# Altium PCB CAN_Module.PcbDoc
Units mil, origin at the board's own origin, x right, y up, seen from the top; angles counter-clockwise.
Board outline 1500 x 1100 mil, 2 copper layers (Top Layer, Bottom Layer); 18 components, 20 nets, 74 pads, 5 vias.
Unrouted connection lines stored in the file: 7.
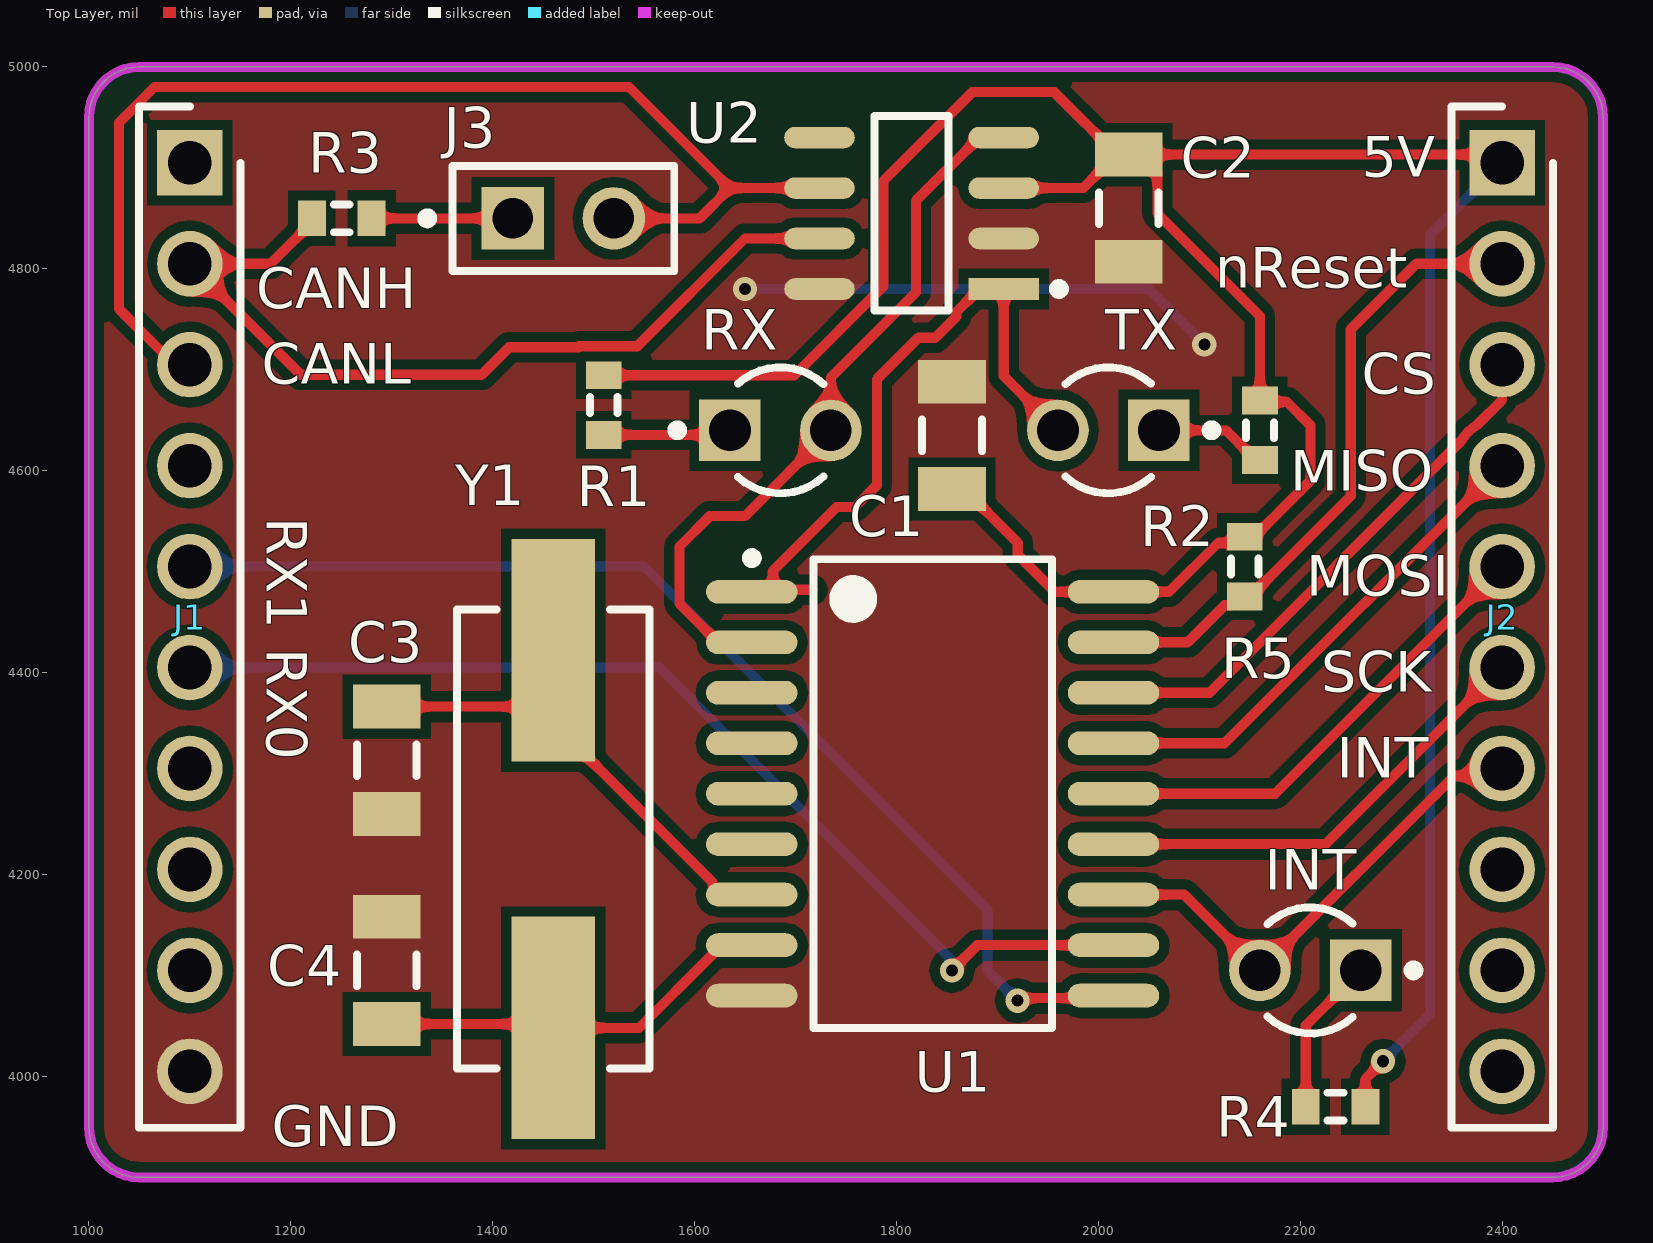
[diagram p0: Top Layer view]
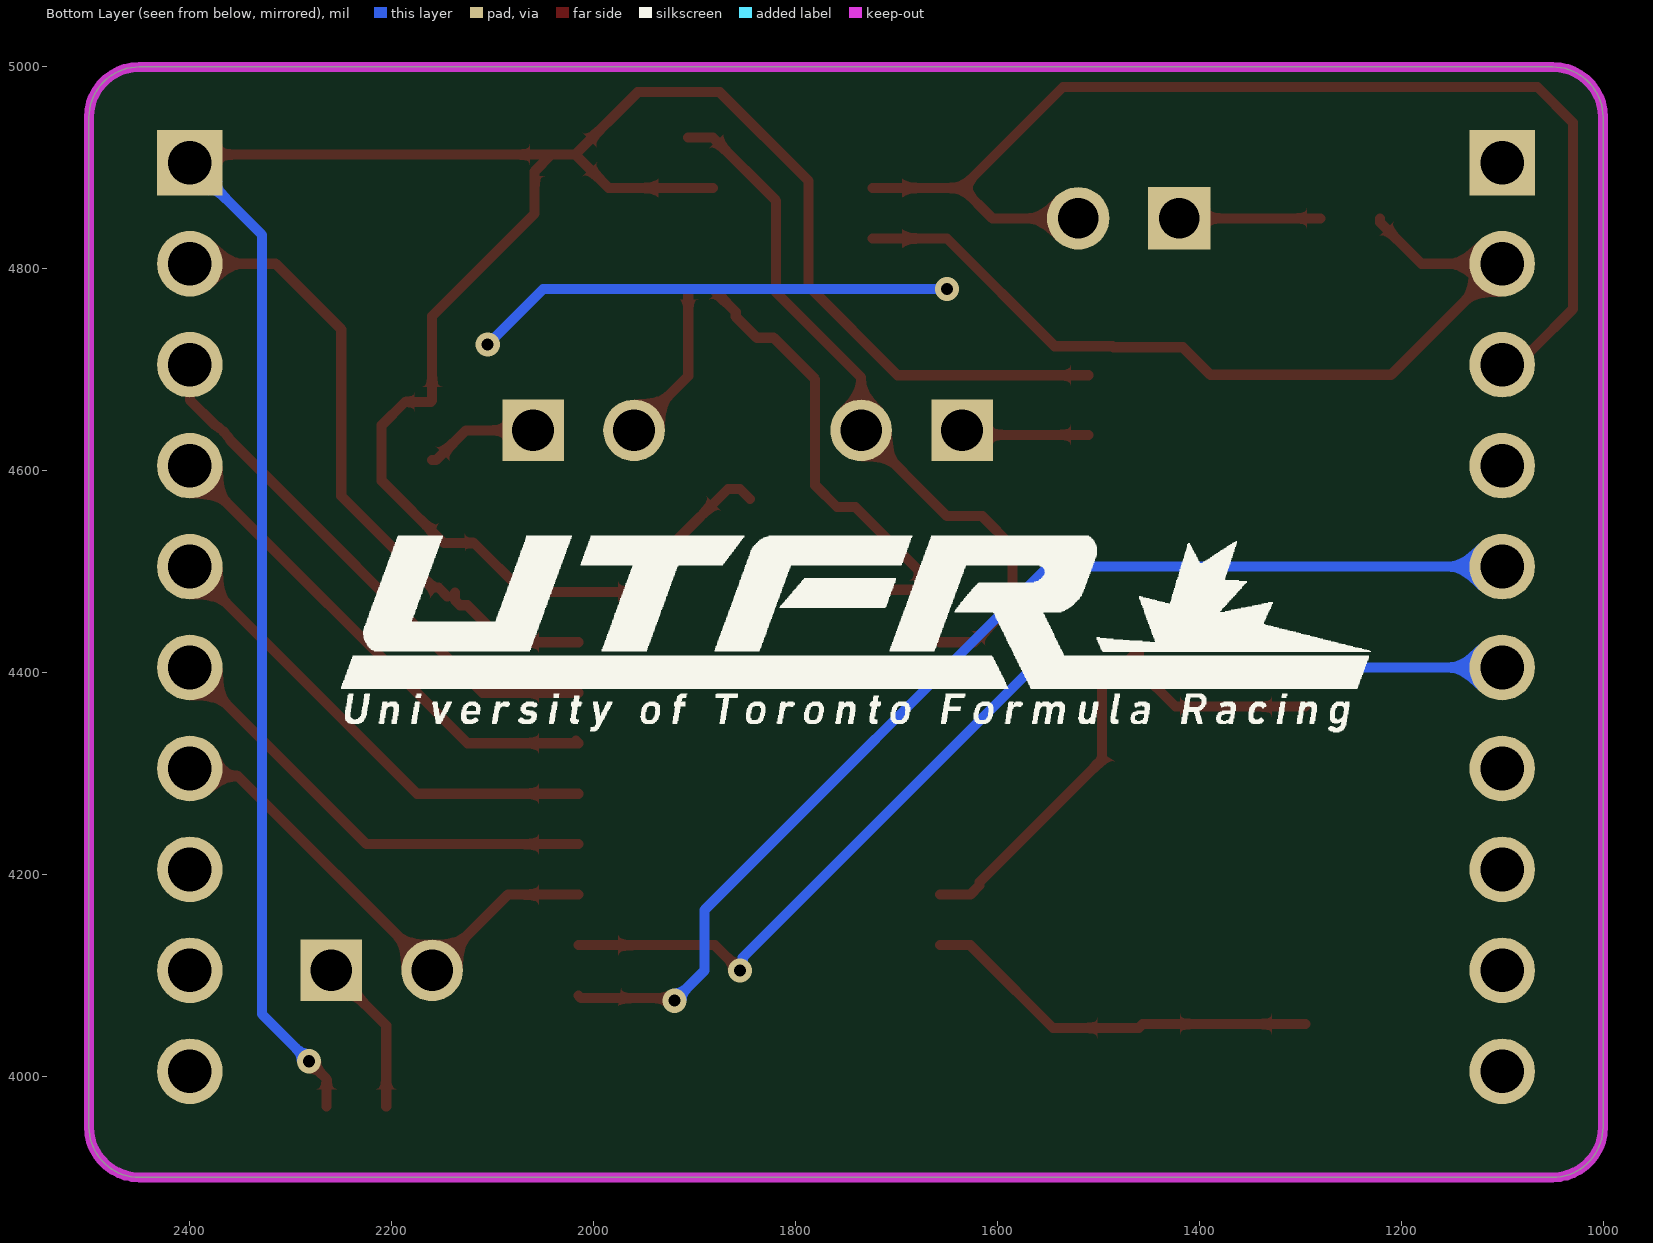
[diagram p1: Bottom Layer view, seen from below]

## Layer stack, top to bottom
Top Solder: solder mask 0.4, Solder Resist, Dk 3.5
Top Layer: signal copper 1.4
Dielectric 1: dielectric 12.6, FR-4, Dk 4.8
Bottom Layer: signal copper 1.4
Bottom Solder: solder mask 0.4, Solder Resist, Dk 3.5

## Board outline
1000,3950 1000,4950 cw(c1050,4950) 1050,5000 2450,5000 cw(c2450,4950) 2500,4950 2500,3950 cw(c2450,3950) 2450,3900 1050,3900 cw(c1050,3950)

## Design rules (kind name [scope] priority, off if disabled: settings)
Clearance [All] p1: gap=10 ignorepadtopadclearanceinfootprint=FALSE except(0: Arc-Hole Track-Hole SMDPad-Hole THPad-Hole Via-Hole Fill-Hole Poly-Hole Region-Hole Text-Hole)
ComponentClearance [All] p1: gap=0 collisioncheckmode=3 verticalgap=0 showdistances=FALSE
PolygonConnect PolygonConnect_3 [All vs IsNamedPolygon('GND_L01_P001')] p1: connectstyle=Direct reliefconductorwidth=10 reliefentries=4 polygonreliefangle="90 Angle" airgapwidth=10
PolygonConnect PolygonConnect_2 [All vs IsNamedPolygon('GND_L01_P001')] p2: connectstyle=Direct reliefconductorwidth=10 reliefentries=4 polygonreliefangle="90 Angle" airgapwidth=10
PolygonConnect PolygonConnect_1 [All vs IsNamedPolygon('NONET_L01_P000')] p3: connectstyle=Direct reliefconductorwidth=10 reliefentries=4 polygonreliefangle="90 Angle" airgapwidth=10
PolygonConnect [All] p4: connectstyle=Relief reliefconductorwidth=10 reliefentries=4 polygonreliefangle="90 Angle" airgapwidth=10
RoutingVias [All] p1: holewidth=28 width=50 viastyle="Through Hole" minholewidth=28 minwidth=50 maxholewidth=28 maxwidth=50
SolderMaskExpansion [All] p1: expansion=4 istentingtop=FALSE
Width [All] p1: maxlimit=10 minlimit=10 preferedwidth=10
29 further rules are at their usual default settings.

## Classes and differential pairs
component class CAN_Module: C1 C2 C3 C4 INT J1 J2 R1 R2 R3 R4 R5 RX TX U1 U2 Y1

## Components (designator, comment, footprint, x,y, rotation, side; value= is the part's Value field where it differs from the comment)
C1 "100nF" C1206 1855,4635 r90 top
C2 "100nF" C1206 2030,4860 r270 top
C3 "22pF" C1206 1295,4313.15 r90 top
C4 "22pF" C1206 1295,4105 r90 top
INT "HLMP-1719" AVAG-HLMP-1719_V 2210,4105 r180 top (schematic designator DS3)
J1 "68000-210HLF" HDRV10W63P0X254_1X10_2540X241X858P 1100,4905 r270 top
J2 "68000-210HLF" HDRV10W63P0X254_1X10_2540X241X858P 2400,4905 r270 top
J3 "Comment" FP-M20-9990246-MFG 1470,4850 r0 top
R1 "470" J1-0603 1510,4665 r90 top value=220
R2 "470" J1-0603 2160,4640 r90 top value=220
R3 "120" J1-0603 1250.47,4850 r0 top value=220
R4 "470" J1-0603 2235,3970 r180 top value=220
R5 "10k" J1-0603 2145,4505 r90 top value=220
RX "HLMP-1719" AVAG-HLMP-1719_V 1685,4640 r0 top (schematic designator DS1)
TX "HLMP-1719" AVAG-HLMP-1719_V 2010,4640 r180 top (schematic designator DS2)
U1 "MCP2515T-I/SO" SOIC-SO18_N 1835.87,4280 r0 top
U2 "MCP2551T-I/SN" FP-C04-057-SN-IPC_C 1815,4855 r180 top
Y1 "16MHZ" FP-ABLS-MFG 1460,4235 r90 top

## Footprints (in the part's own frame and the unit in brackets; to place one, negate y for a bottom-side part, rotate by r counter-clockwise, add the part's x,y. Pads: shape width x height; smd on the part's side, far side on the other; paste and mask are expansions set on the pad)
AVAG-HLMP-1719_V [mm] "THD, 2-Leads, Body Dia 3.175mm"
  rect 1.55x1.55 hole 1.05: 1(-1.27,0)
  round 1.55 hole 1.05: 2(1.27,0)
  silkscreen extent -2.72,-1.58 1.08,1.58
C1206 [mm] "Chip Capacitor, Body 3.2x1.6mm, IPC High Density"
  rect 1.1x1.7 smd: 1(-1.35,0) 2(1.35,0)
  silkscreen extent -0.4,-0.75 0.4,0.75, body extent -1.7,-0.9 1.7,0.9, height 1.3
FP-ABLS-MFG [mm]
  rect 5.6x2.1 smd paste+0 mask+0: 1(-4.75,0) 2(4.75,0)
  silkscreen extent -5.77,-2.42 5.77,2.42, body extent -7.65,-2.52 7.65,2.52, height 0.25
FP-C04-057-SN-IPC_C [mil]
  rect 69.96x21.34 smd paste+0 mask+0: 1(-91.24,75)
  rrect100% 69.96x21.34 smd paste+0 mask+0: 2(-91.24,25) 3(-91.24,-25) 4(-91.24,-75) 5(91.24,-75) 6(91.24,-25) 7(91.24,25) 8(91.24,75)
  silkscreen extent -151,-96 37,96, body extent -130,-100 130,100, height 10
FP-M20-9990246-MFG [mm]
  rect 1.57x1.57 hole 1.02 paste-1000 mask+0: 1(-1.27,0)
  round 1.57 hole 1.02 paste-1000 mask+0: 2(1.27,0)
  silkscreen extent -3.55,-1.32 2.79,1.32, body extent -2.89,-1.42 2.89,1.42, height 0.25
HDRV10W63P0X254_1X10_2540X241X858P [mm]
  rect 1.65x1.65 hole 1.1: 1(0,0)
  round 1.65 hole 1.1: 2(2.54,0) 3(5.08,0) 4(7.62,0) 5(10.16,0) 6(12.7,0) 7(15.24,0) 8(17.78,0) 9(20.32,0) 10(22.86,0)
  silkscreen extent -1.42,-1.28 24.28,1.28, body extent -1.27,-1.27 24.13,1.14, height 8.58
J1-0603 [mm] "Chip Resistor, Body 1.6x0.8mm, IPC High Density"
  rect 0.7x0.9 smd: 1(-0.75,0) 2(0.75,0)
  silkscreen extent -0.2,-0.35 0.2,0.35, body extent -0.85,-0.48 0.85,0.48, height 0.9
SOIC-SO18_N [mm] "SOIC, 18-Leads, Body 11.6x7.5mm, Pitch 1.27mm, IPC Medium Density"
  oval 2.3x0.6 smd: 1(-4.55,5.08) 2(-4.55,3.81) 3(-4.55,2.54) 4(-4.55,1.27) 5(-4.55,0) 6(-4.55,-1.27) 7(-4.55,-2.54) 8(-4.55,-3.81) 9(-4.55,-5.08) 10(4.55,-5.08) 11(4.55,-3.81) 12(4.55,-2.54) 13(4.55,-1.27) 14(4.55,0) 15(4.55,1.27) 16(4.55,2.54) 17(4.55,3.81) 18(4.55,5.08)
  silkscreen extent -4.67,-5.9 3,6.05, body extent -3.8,-5.87 3.8,5.87, height 2.65

## Part data
C1 C2 C3 C4: library part "Cap Semi", "Capacitor (Semiconductor SIM Model)", LatestRevisionDate=29-May-2009, LatestRevisionNote="IPC-7351 Footprint Added.", PackageDescription="Chip Capacitor", PackageReference=C1206, Published=8-Jun-2000, Publisher="Altium Limited"
INT RX TX: library part CMP-2000-06410-1, "Low Current LED Lamp, T-1 (3 mm), 1.8 V, 2 mA, -40 to 100 degC, 2-Pin THD, RoHS, Bulk", Color=Yellow, Dominant Wavelength/Color Temperature=585nm, Manufacturer=AvagoTechnologies, Package=2T-1, Package Description="2-Pin Through Hole Device, Body Dia 3.175 mm", Category=LEDs, Datasheet URL=http://www.avagotech.com/docs/AV02-1557EN, Datasheet Version=07/2014, Intensity=2.1mcd, Lens Appearance=ColoredDiffused, Lens Shape Type=Circular, Manufacturer URL=http://www.avagotech.com/, Mounting=ThroughHole, Mounting Orientation=TopMount, Mounting Technology=ThroughHole, Number of LEDs=1, Package Reference=HLMP-1719, Packaging=Bulk, Pin Count=2, Type=Uni-Color, Viewing Angle=50°
J1 J2: "Connector", Manufacturer_Name=Amphenol, Mouser Part Number=649-68000-210HLF, Arrow Part Number=68000-210HLF, Arrow Price/Stock=https://www.arrow.com/en/products/68000-210hlf/amphenol-fci, Datasheet Link=https://cdn.amphenol-icc.com/media/wysiwyg/files/drawing/68000.pdf, Height=8.58mm, Manufacturer_Part_Number=68000-210HLF, Mouser Price/Stock=https://www.mouser.co.uk/ProductDetail/Amphenol-FCI/68000-210HLF?qs=QKvFUfBIyQINb7f%2F4SDc2A%3D%3D
R1 R2 R3 R4 R5: library part Res3, "Resistor", LatestRevisionDate=29-May-2009, LatestRevisionNote="IPC-7351 Footprint Added.", PackageDescription="Chip Resistor", PackageReference=J1-0603, Published=8-Jun-2000, Publisher="Altium Limited"
U1: library part CMP-0186-00139-2, "Stand-Alone CAN Controller With SPI Interface, 18-Pin SOIC, Industrial Temperature, Tape and Reel", Code_JEDEC=MS-013, ComponentLink1Description="Manufacturer URL", ComponentLink1URL=http://www.microchip.com/, ComponentLink2Description=Datasheet, ComponentLink2URL=http://ww1.microchip.com/downloads/en/DeviceDoc/21801f.pdf, ComponentLink3Description="Package Specification", ComponentLink3URL=http://www.microchip.com/stellent/groups/techpub_sg/documents/packagingspec/en012702.pdf, DatasheetVersion="revF, Oct-2010", PackageDescription="18-Lead Plastic Small Outline (SO) - Wide 7.50mm Body [SOIC]", PackageReference=SOIC-SO18, PackageVersion="revBB, Aug-2009", RevisionNote="URLs added. DatasheetVersion updated."
U2: library part CMP-0186-00037-3, "IC TRANSCEIVER HALF 1/1 8SOIC", Case/Package=SOIC, Max Operating Temperature=85°C, Max Supply Current=75mA, Max Supply Voltage=5.5V, Min Operating Temperature=-40°C, Min Supply Voltage=4.5V, Operating Supply Voltage=5V, Package Quantity=3300, Data Rate=1Mbps, Height=1.5mm, Interface=CAN, Lead Free="Lead Free", Length=4.9mm, Logic Function=Transceiver, Mount="Surface Mount", Nominal Supply Current=75mA, Number of Drivers=1, Number of Pins=8, Number of Receive Buffers=1, Number of Receivers=1, Number of Transceivers=1, Number of Transmit Buffers=1, Packaging="Tape and Reel", Radiation Hardening=No, REACH SVHC="No SVHC", Width=3.9mm
Y1: library part CMP-27762-000003-1, "CRYSTAL 16.0000MHZ 18PF SMD / ABLS-16.000MHZ-K4T", Frequency=16MHz, Load Capacitance=18pF, Manufacturer=Abracon, Manufacturer Part Number=ABLS-16.000MHZ-K4T, Package=ABLS, Temperature="-40°C to +125°C", Temperature Range High=+125°C, Temperature Range Low=-40°C, Tolerance=30ppm, Automotive=No, Category=Crys, ComponentLink2Description=Datasheet, ComponentLink2URL=https://abracon.com/Resonators/abls.pdf, Device Class L1="Passive Components", Device Class L2="Crystals / Oscillators", Device Class L3=Crystals, Digikey Description="CRYSTAL 16.0000MHZ 18PF SMD", Esr=40Ω, Height=4.3mm, Lead Free=Yes, Mouser Description="Crystal 16MHz ±30ppm (Tol) ±50ppm (Stability) 18pF FUND 40Ohm 2-Pin HC-49/US SMD T/R", Octopart=https://octopart.com/abls-16.000mhz-k4t-abracon-18618626, RoHS=TRUE, Series=ABLS, Stability=50ppm, Standoff Height=0mm

## Via types
v1: diameter 24, hole 12, Top Layer to Bottom Layer, 5 vias

## Nets (pads, with @x,y where several pads share a name; then routed paths per layer and width w, separated by ;. In a path a pad name is that pad's centre, name@x,y a point inside that pad or via, vN(x,y) a via of type N, cw(c..) or ccw(c..) an arc to the next point about the centre after c; other vN are vias at no path point)
Arduino_5V: C1.1 C2.1 J2.1 R1.2 R2.2 R4.1 R5.2 U1.18 U2.3 | length 3109
  Top Layer w10: R1.2 1698.9,4694.53 1786.95,4782.58 1786.95,4886.95 1875,4975 1956.34,4975 C2.1@2018.19,4913.15 ; C1.1@1845,4571.85 C1.1 1866.81,4581.85 1920.16,4528.5 1920.16,4516.69 1956.85,4480 2070,4480 2118.41,4528.41 2148.41,4528.41 2210,4590 2210,4645 2186.86,4668.14 2161.39,4668.14 R2.2 2160,4753.18 2058.46,4854.72 2058.46,4896.5 C2.1@2041.81,4913.15 ; U2.3@1881.93,4880 U2.3 1985.04,4880 C2.1@2018.19,4913.15 ; R4.1 2264.53,3997.53 v1(2282,4015) ; J2.1 2391.85,4913.15 C2.1@2041.81,4913.15 ; C2.1@2018.19,4913.15 C2.1 C2.1@2041.81,4913.15
  Bottom Layer w10: v1(2282,4015) 2328.6,4061.6 2328.6,4833.6 J2.1
CAN_INT: INT.2 J2.7 U1.12 | length 498.9
  Top Layer w10: U1.12 2085,4180 INT.2 2352.52,4297.52 2392.52,4297.52 J2.7
CANH: J1.2 R3.1 U2.7 | length 867.1
  Top Layer w10: R3.1 1220.94,4846.06 1179.88,4805 J1.2 1210,4695 1389.06,4695 1416.34,4722.28 1485.05,4722.28 1486.07,4723.31 1543.31,4723.31 1650,4830 U2.7
CANL: J1.3 J3.2 U2.6 | length 1154.9
  Top Layer w10: J1.3 1085.13,4705 1069.05,4721.07 1068.93,4721.07 1030,4760 1030,4945 1065,4980 1535,4980 1635,4880 ; J3.2 1605,4850 1635,4880 ; U2.6 1635,4880
CS: J2.3 U1.16 | length 540.4
  Top Layer w10: U1.16 2110,4380 2359.08,4629.08 cw(c2400,4605) 2375.92,4645.92 2400,4670 J2.3
GND: C1.2 C2.2 C3.1 C4.2 J1.10 U1.9 U2.2 U2.8 | length 477.8
  Bottom Layer w10: v1(1650,4780) 2050,4780 v1(2105,4725)
MISO: J2.4 U1.15 | length 502.6
  Top Layer w10: U1.15@2017.61,4332.61 U1.15 2125,4330 J2.4
MOSI: J2.5 U1.14 | length 478.2
  Top Layer w10: U1.14 2175,4280 J2.5
NetC3_2: C3.2 U1.7 Y1.2 | length 540.4
  Top Layer w10: C3.2 1423.66,4366.3 1460,4402.64 Y1.2 1496.34,4385.67 1496.34,4313.66 1617.68,4192.32 1617.68,4189.28 1626.95,4180 U1.7
NetC4_1: C4.1 U1.8 Y1.1 | length 397.3
  Top Layer w10: C4.1 1456.14,4051.85 Y1.1 1544.95,4047.99 1616.46,4119.5 1626.95,4130 U1.8
NetDS1_1: R1.1 RX.1 | length 126.9
  Top Layer w10: R1.1 1630.47,4635.47 RX.1
NetDS2_1: R2.1 TX.1 | length 112.2
  Top Layer w10: TX.1 2126.54,4640 2156.06,4610.47 R2.1
NetDS3_1: INT.1 R4.2 | length 157.6
  Top Layer w10: R4.2 2205.47,4050.47 INT.1
NetR3_2: J3.1 R3.2 | length 140
  Top Layer w10: R3.2 J3.1
Reset: J2.2 R5.1 U1.17 | length 635.1
  Top Layer w10: U1.17 2088.46,4430 2116.2,4457.74 2125.16,4466.69 2132.28,4466.69 2137.5,4471.91 R5.1@2137.5,4479.04 ; R5.1 2153.78,4484.25 2159.25,4484.25 2250,4575 2250,4740 2315,4805 J2.2
RX0: J1.6 U1.11 | length 1055.5
  Top Layer w10: v1(1855,4105) 1880,4130 U1.11
  Bottom Layer w10: J1.6 1565,4405 1852.32,4117.68 1852.32,4107.68 v1(1855,4105)
RX1: J1.5 U1.10 | length 1130.3
  Top Layer w10: v1(1920,4075) 1922.5,4077.5 2012.5,4077.5 U1.10
  Bottom Layer w10: J1.5 1550,4505 1890,4165 1890,4105 v1(1920,4075)
RXCAN: RX.2 U1.2 U2.4 | length 717.1
  Top Layer w10: U1.2 1623.27,4430 1585,4468.27 1585,4525 1615,4555 1650,4555 RX.2 1735,4692.22 1819.23,4776.45 1819.23,4867.3 1881.93,4930 U2.4
SCK: J2.6 U1.13 | length 457.5
  Top Layer w10: U1.13 2225,4230 J2.6
TXD: TX.2 U1.1 U2.1 | length 670
  Top Layer w10: 1717.01,4482.01 1677.69,4482.01 1671.39,4482.01 1658.74,4482.01 U1.1 1671.39,4480 1677.69,4486.29 1677.69,4500.95 1740.71,4563.98 1758.98,4563.98 1780.51,4585.51 1780.51,4690.51 1821.65,4731.65 1838.28,4731.65 1859.23,4752.6 1859.23,4757.3 1881.93,4780 U2.1 1906.24,4693.76 TX.2
pads on no net: J1.1 J1.4 J1.7 J1.8 J1.9 J2.8 J2.9 J2.10 U1.3 U1.4 U1.5 U1.6 U2.5

## Polygon pours and split planes (outlines as drawn)
GND on Top Layer "GND_L01_P001" (solid, remove dead copper, pour order 1): 1000,3900 1000,5000 2500,5000 2500,3900

## Keep-outs
Keep-Out Layer:
  the board outline again, w10

## Silkscreen, mask and mechanical layers (free items; w line width, h text height)
Top Overlay:
  text "5V" at 2261,4891 h40
  text "nReset" at 2116,4781 h40
  text "CANH" at 1166,4761 h40
  text "CANL" at 1171,4686 h40
  text "CS" at 2261,4676 h40
  text "MISO" at 2190,4580 h40
  text "RX1" at 1176,4554 h40 r270
  text "MOSI" at 2206,4476 h40
  text "RX0" at 1176,4424 h40 r270
  text "SCK" at 2221,4381 h40
  text "INT" at 2236,4296 h40
  text "GND" at 1181,3931 h40
Bottom Overlay:
  drawing of 42 lines, arcs and shapes, not listed